# Altium PCB Mp100.PcbDoc (part 1 of 2)
Units mil, origin at the board's own origin, x right, y up, seen from the top; angles counter-clockwise.
Board outline 1180 x 2360 mil, 2 copper layers (Top Layer, Bottom Layer); 72 components, 52 nets, 275 pads, 61 vias.
Unrouted connection lines stored in the file: 1.
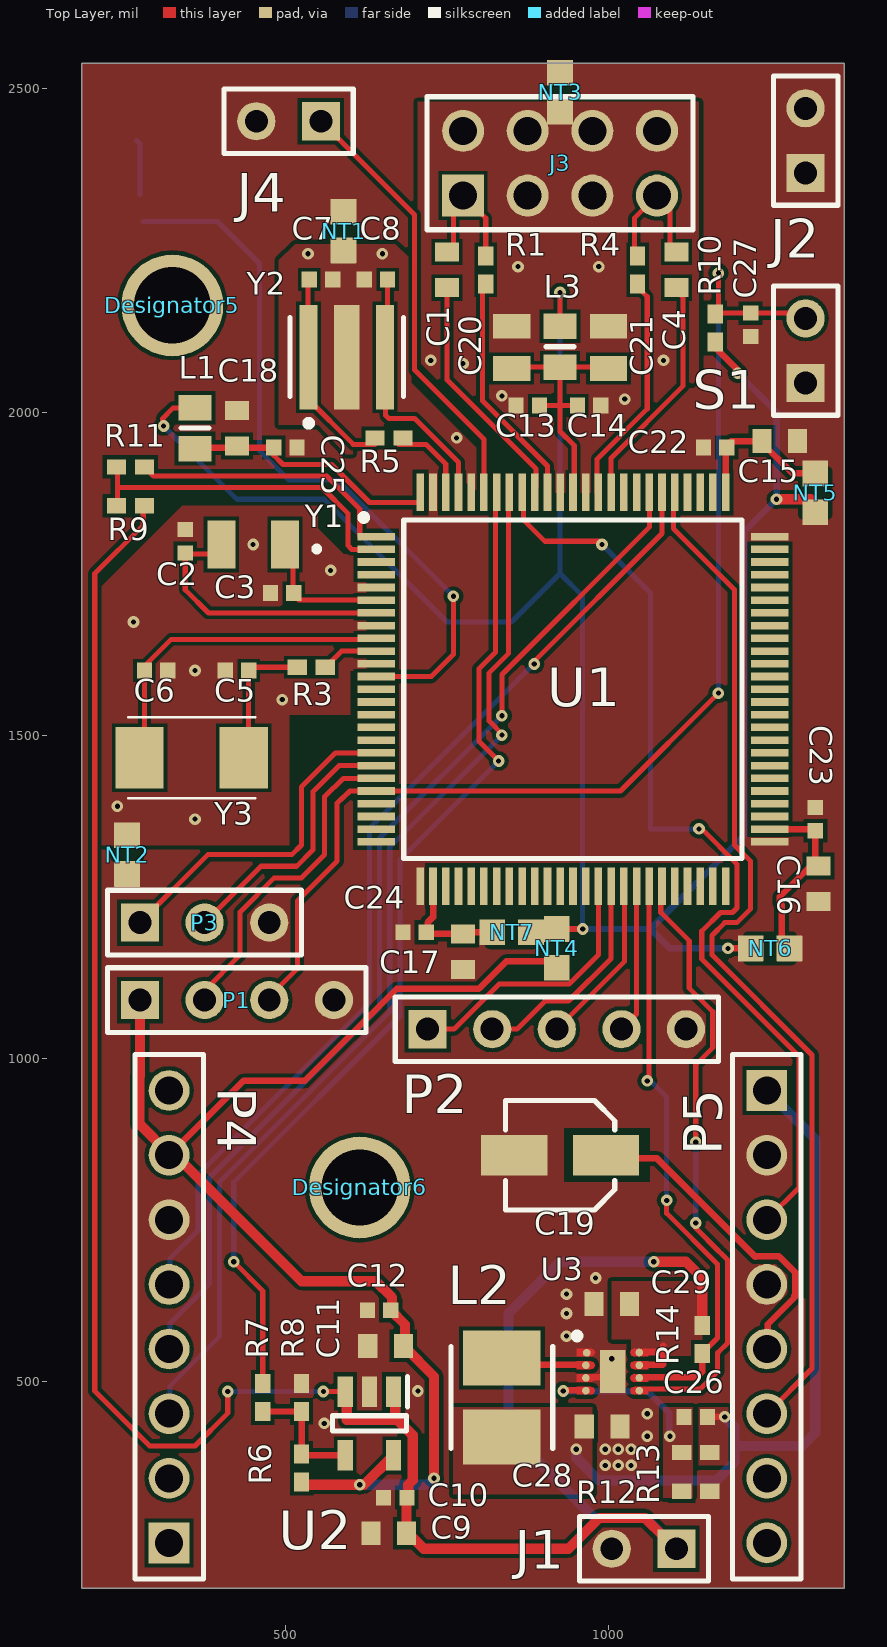
[diagram p0: Top Layer view]
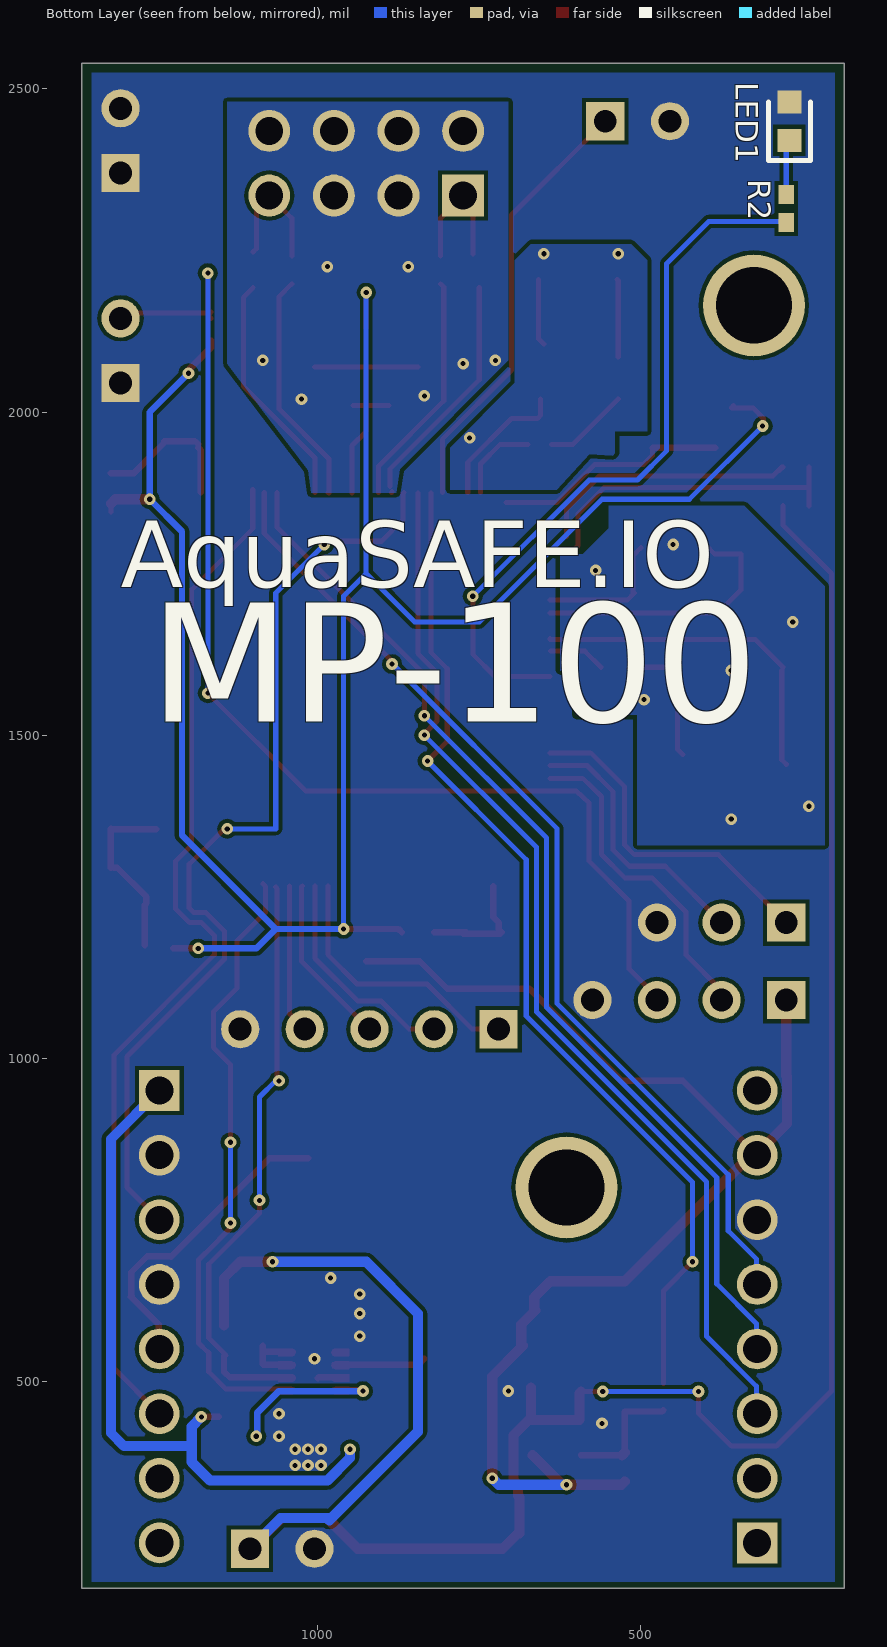
[diagram p1: Bottom Layer view, seen from below]

## Layer stack, top to bottom
Top Solder: solder mask 0.4, Solder Resist, Dk 3.5
Top Layer: signal copper 1.4
Dielectric 1: dielectric 12.6, FR-4, Dk 4.8
Bottom Layer: signal copper 1.4
Bottom Solder: solder mask 0.4, Solder Resist, Dk 3.5

## Board outline
185,180 185,2540 1365,2540 1365,180

## Design rules (kind name [scope] priority, off if disabled: settings)
Clearance [All] p1: gap=6 ignorepadtopadclearanceinfootprint=TRUE
ComponentClearance ComponentClearance_1 [InComponent('J3') vs InComponent('NT3')] p1: gap=0 collisioncheckmode=3 verticalgap=0 showdistances=FALSE
ComponentClearance [All] p2: gap=10 collisioncheckmode=3 verticalgap=10 showdistances=FALSE
HoleSize [All] p1: absolutevalues=TRUE maxlimit=196.85 minlimit=1 maxpercent=80.000 minpercent=20.000
MinimumAnnularRing [All] p1: minimumring=5
MinimumSolderMaskSliver [All] p1: minsoldermaskwidth=2
PlaneClearance [All] p1: clearance=7.87
PlaneConnect [All] p1: planeconnectstyle=Direct reliefexpansion=20 reliefentries=4 reliefconductorwidth=10 reliefairgap=10
PolygonConnect [All] p1: connectstyle=Direct reliefconductorwidth=10 reliefentries=4 polygonreliefangle="90 Angle" airgapwidth=10
RoutingVias [All] p1: holewidth=7.87 width=7.87 viastyle="Through Hole" minholewidth=15.75 minwidth=7.87 maxholewidth=28 maxwidth=50
SilkToSilkClearance [All] p1: silktosilkclearance=5
SilkToSolderMaskClearance [IsPad] p1: minsilkscreentomaskgap=5 clearancetoexposedcopper=TRUE
SolderMaskExpansion [All] p1: expansion=5
UnRoutedNet [All] p1: checkbadconnections=TRUE
Width [All] p1: maxlimit=15.75 minlimit=7.87 preferedwidth=10 minimp=50.000000 maximp=50.000000 favimp=50.000000
22 further rules are at their usual default settings.

## Components (designator, comment, footprint, x,y, rotation, side; value= is the part's Value field where it differs from the comment)
C1 "GRM1885C1H102FA01J" CAPC1608X90N 750,2220 r90 top value=1000pF
C2 "GRM1555C1H120JA01D" CAPC1005X55N 345,1800 r270 top value=12pF
C3 "GRM1555C1H120JA01D" CAPC1005X55N 495,1720 r180 top value=12pF
C4 "GRM1885C1H102FA01J" CAPC1608X90N 1105,2220 r90 top value=1000pF
C5 "GRM1555C1H120JA01D" CAPC1005X55N 425,1600 r180 top value=12pF
C6 "GRM1555C1H120JA01D" CAPC1005X55N 300,1600 r0 top value=12pF
C7 "GRM1555C1H120JA01D" CAPC1005X55N 555,2205 r0 top value=12pF
C8 "GRM1555C1H120JA01D" CAPC1005X55N 640,2205 r180 top value=12pF
C9 "GRM188R61A106ME69D" CAPC1608X90N 660,265 r180 top value=10uF
C10 "GRM155R71C104KA88D" CAPC1005X55N 670,320 r180 top value=0.1uF
C11 "GRM188R61A106ME69D" CAPC1608X90N 655,555 r180 top value=10uF
C12 "GRM155R71C104KA88D" CAPC1005X55N 645,610 r180 top value=0.1uF
C13 "GRM1555C1H102JA01D" CAPC1005X55N 875,2010 r180 top value=1000pF
C14 "GRM1555C1H102JA01D" CAPC1005X55N 970,2010 r180 top value=1000pF
C15 "GRM188R71A105KA61D" CAPC1608X90N 1265,1955 r0 top value=1uF
C16 "GRM188R71A105KA61D" CAPC1608X90N 1325,1270 r90 top value=1uF
C17 "GRM188R71A105KA61D" CAPC1608X90N 775,1165 r270 top value=1uF
C18 "GRM188R71A105KA61D" CAPC1608X90N 425,1975 r90 top value=1uF
C19 "4.7F" WCAP-ASLU_4x5.5 925,850 r0 top
C20 "GRM21BR60J476ME15L" CAPC2012X145N 850,2100 r270 top value=47uF
C21 "GRM21BR60J476ME15L" CAPC2012X145N 1000,2100 r90 top value=47uF
C22 "GRM155R71C104KA88D" CAPC1005X55N 1165,1945 r180 top value=0.1uF
C23 "GRM155R71C104KA88D" CAPC1005X55N 1320,1370 r90 top value=0.1uF
C24 "GRM155R71C104KA88D" CAPC1005X55N 700,1195 r0 top value=0.1uF
C25 "GRM155R71C104KA88D" CAPC1005X55N 500,1945 r0 top value=0.1uF
C26 "GRM1555C1H120JA01D" CAPC1005X55N 1135,445 r0 top value=12pF
C27 "GRM1555C1H102JA01D" CAPC1005X55N 1220,2135 r270 top value=1000pF
C28 "GRM188R61A106ME69D" CAPC1608X90N 990,430 r0 top value=10uF
C29 "GRM188R61A106ME69D" CAPC1608X90N 1005,620 r180 top value=10uF
Designator5 "Comment" "Screw M4" 325,2165 r0 top
Designator6 "Comment" "Screw M4" 615,800 r0 top
J1 "TSW-102-07-G-S" HDR1X2 1105,241.02 r180 top
J2 "TSW-102-07-G-S" HDR1X2 1305,2370 r90 top
J3 "TSW-104-07-G-D" 61300821121 925,2385 r0 top
J4 "HMTSW-102-07-G-S-240" HDR1X2 555,2450 r180 top
L1 "MPZ2012S601A" 6-0805_L 360,1975 r90 top value="600 ohm"
L2 "LQH44PN1R0NP0L" INDM4040X180N 835,475 r270 top value=1uH
L3 "MPZ2012S601A" 6-0805_L 925,2101.02 r90 top value="600 ohm"
LED1 "LTST-C190CKT" LEDC1608X90N 270,2450 r90 bottom value=Red
NT1 "Net-Tie" 2way_MP 590,2280 r90 top net-tie
NT2 "Net-Tie" 2way_MP 255,1315 r270 top net-tie
NT3 "Net-Tie" 2way_MP 925,2495 r90 top net-tie
NT4 "Net-Tie" 2way_MP 920,1170 r270 top net-tie
NT5 "Net-Tie" 2way_MP 1320,1875 r270 top net-tie
NT6 "Net-Tie" 2way_MP 1250,1170 r180 top net-tie
NT7 "Net-Tie" 2way_MP 850,1195 r0 top net-tie
P1 "Header 4" HDR1X4 275,1090 r0 top
P2 "Header 5" HDR1X5 720,1045 r0 top
P3 "Header 3" HDR1X3 275,1210 r0 top
P4 "Sim800c" 61300811121 320,600 r90 top locked
P5 "Sim800c" 61300811121 1245,600 r270 top locked
R1 "CRCW0402200RFKED" RESC1005X40N 810,2220 r270 top value=200
R2 "CRCW0402470RJNED" RESC1005X40N 275,2315 r90 bottom value=470
R3 "CRCW040222R0JNED" RESC1005X40N 540,1605 r0 top value=22
R4 "CRCW0402200RFKED" RESC1005X40N 1045,2220 r270 top value=200
R5 "CRCW040222R0JNED" RESC1005X40N 660,1960 r0 top value=22
R6 "CRCW04021M74FKED" RESC1005X40N 525,366.02 r270 top value=1.74M
R7 "DNP" RESC1005X40N 465,475 r270 top
R8 "CRCW04021M00JNED" RESC1005X40N 525,475 r270 top value=1M
R9 "CRCW0402100KJNED" RESC1005X40N 260,1855 r0 top value=100k
R10 "CRCW040247K0JNED" RESC1005X40N 1165,2130 r270 top value=47k
R11 "CRCW0402100KJNED" RESC1005X40N 260,1915 r180 top value=100k
R12 "CRCW0402470RJNED" RESC1005X40N 1135,330 r180 top value=470
R13 "CRCW0402470RJNED" RESC1005X40N 1135,390 r0 top value=470
R14 "CRCW0402100KJNED" RESC1005X40N 1145,565 r270 top value=100k
S1 "SPST-NO" HDR1X2 1305,2045 r90 top
U1 "MSP430FR6047IPZR" QFP50P1600X1600X160-100N 945,1571.02 r0 top
U2 "TPS78001DDCR" SOT95P280X145-5N 630,435 r270 top
U3 "NCP6354BMTAATBG" SON50P200X200X80-9N-D 1006.34,515.16 r0 top
Y1 "ABS07-32.768KHZ-9-T" ABS-07 450,1795 r180 top
Y2 "AWSCR-8.00CV-T" Abracon_AWSCR-8.00CV-T_0 595,2085 r0 top
Y3 "ABM3-8.000MHZ-D2Y-T" ABM38000MHzD2YT 355,1465 r0 top

## Footprints (in the part's own frame and the unit in brackets; to place one, negate y for a bottom-side part, rotate by r counter-clockwise, add the part's x,y. Pads: shape width x height; smd on the part's side, far side on the other; paste and mask are expansions set on the pad)
2way_MP [mil] "2 way medium power net tie junction"
  rrect5% 40x40 smd paste-100: 1(-30,0) 2(30,0)
6-0805_L [mm] "Chip Resistor, Body 2.0x1.2mm, IPC High Density"
  rect 1x1.3 smd: 1(-0.8,0) 2(0.8,0)
  silkscreen extent 0,-0.55 0,0.55, body extent -1.07,-0.7 1.07,0.7, height 0.7
61300811121 [mm] "Pin Header, pitch 2.54 mm, THT, Vertical, single row, 8p"
  rect 1.6x1.6 hole 1.1: 1(-8.89,0)
  round 1.6 hole 1.1: 2(-6.35,0) 3(-3.81,0) 4(-1.27,0) 5(1.27,0) 6(3.81,0) 7(6.35,0) 8(8.89,0)
  silkscreen extent -10.31,-1.35 10.31,1.35, body extent -10.16,-1.27 10.16,1.27, height 8.57
61300821121 [mm] "Pin Header, pitch 2.54 mm, THT, Vertical, dual row, 8p"
  rect 1.65x1.65 hole 1.1: 1(-3.81,-1.27)
  round 1.65 hole 1.1: 2(-3.81,1.27) 3(-1.27,-1.27) 4(-1.27,1.27) 5(1.27,-1.27) 6(1.27,1.27) 7(3.81,-1.27) 8(3.81,1.27)
  silkscreen extent -5.23,-2.62 5.23,2.62, body extent -5.08,-2.54 5.08,2.54, height 8.59
ABM38000MHzD2YT [mm]
  rect 1.9x2.4 smd: 1(-2.05,0) 2(2.05,0)
  silkscreen extent -2.5,-1.6 2.5,1.6
Abracon_AWSCR-8.00CV-T_0 [mm]
  rect 0.7x4.1 smd paste+0 mask+0: 1(-1.5,0) 3(1.5,0)
  rect 1x4.1 smd paste+0 mask+0: 2(0,0)
  silkscreen extent -2.22,-2.72 2.22,1.55, body extent -2.05,-2.15 2.05,2.15, height 0.25
ABS-07 [mm]
  rect 1.1x1.9 smd: 1(-1.25,0) 2(1.25,0)
  silkscreen extent -2.58,0.09 -2.41,0.26
CAPC1005X55N [mm]
  rect 0.6x0.62 smd: 1(-0.46,0) 2(0.46,0)
CAPC1608X90N [mm]
  rect 0.75x0.94 smd: 1(-0.7,0) 2(0.7,0)
CAPC2012X145N [mm]
  rect 0.97x1.47 smd: 1(-0.83,0) 2(0.83,0)
HDR1X2 [mm] "Connector; Header; 2 Position"
  rect 1.5x1.5 hole 0.9: 1(0,0)
  round 1.5 hole 0.9: 2(2.54,0)
  silkscreen extent -1.27,-1.27 3.81,1.27
HDR1X3 [mm] "Connector; Header; 3 Position"
  rect 1.5x1.5 hole 0.9: 1(0,0)
  round 1.5 hole 0.9: 2(2.54,0) 3(5.08,0)
  silkscreen extent -1.27,-1.27 6.35,1.27
HDR1X4 [mm] "Connector; Header; 4 Position"
  rect 1.5x1.5 hole 0.9: 1(0,0)
  round 1.5 hole 0.9: 2(2.54,0) 3(5.08,0) 4(7.62,0)
  silkscreen extent -1.27,-1.27 8.89,1.27
HDR1X5 [mm] "Connector; Header; 5 Position"
  rect 1.5x1.5 hole 0.9: 1(0,0)
  round 1.5 hole 0.9: 2(2.54,0) 3(5.08,0) 4(7.62,0) 5(10.16,0)
  silkscreen extent -1.27,-1.27 11.43,1.27
INDM4040X180N [mm]
  rect 2.15x3.05 smd: 1(-1.55,0) 2(1.55,0)
  silkscreen extent -2,-2 2,2
LEDC1608X90N [mm]
  rect 0.9x0.95 smd: 1(-0.75,0) 2(0.75,0)
  silkscreen extent -1.55,-0.82 0.75,0.82
QFP50P1600X1600X160-100N [mm]
  rect 1.475x0.3 smd: 1(-7.738,6) 2(-7.738,5.5) 3(-7.738,5) 4(-7.738,4.5) 5(-7.738,4) 6(-7.738,3.5) 7(-7.738,3) 8(-7.738,2.5) 9(-7.738,2) 10(-7.738,1.5) 11(-7.738,1) 12(-7.738,0.5) 13(-7.738,0) 14(-7.738,-0.5) 15(-7.738,-1) 16(-7.738,-1.5) 17(-7.738,-2) 18(-7.738,-2.5) 19(-7.738,-3) 20(-7.738,-3.5) 21(-7.738,-4) 22(-7.738,-4.5) 23(-7.738,-5) 24(-7.738,-5.5) 25(-7.738,-6) 51(7.738,-6) 52(7.738,-5.5) 53(7.738,-5) 54(7.738,-4.5) 55(7.738,-4) 56(7.738,-3.5) 57(7.738,-3) 58(7.738,-2.5) 59(7.738,-2) 60(7.738,-1.5) 61(7.738,-1) 62(7.738,-0.5) 63(7.738,0) 64(7.738,0.5) 65(7.738,1) 66(7.738,1.5) 67(7.738,2) 68(7.738,2.5) 69(7.738,3) 70(7.738,3.5) 71(7.738,4) 72(7.738,4.5) 73(7.738,5) 74(7.738,5.5) 75(7.738,6)
  rect 0.3x1.475 smd: 26(-6,-7.738) 27(-5.5,-7.738) 28(-5,-7.738) 29(-4.5,-7.738) 30(-4,-7.738) 31(-3.5,-7.738) 32(-3,-7.738) 33(-2.5,-7.738) 34(-2,-7.738) 35(-1.5,-7.738) 36(-1,-7.738) 37(-0.5,-7.738) 38(0,-7.738) 39(0.5,-7.738) 40(1,-7.738) 41(1.5,-7.738) 42(2,-7.738) 43(2.5,-7.738) 44(3,-7.738) 45(3.5,-7.738) 46(4,-7.738) 47(4.5,-7.738) 48(5,-7.738) 49(5.5,-7.738) 50(6,-7.738) 76(6,7.738) 77(5.5,7.738) 78(5,7.738) 79(4.5,7.738) 80(4,7.738) 81(3.5,7.738) 82(3,7.738) 83(2.5,7.738) 84(2,7.738) 85(1.5,7.738) 86(1,7.738) 87(0.5,7.738) 88(0,7.738) 89(-0.5,7.738) 90(-1,7.738) 91(-1.5,7.738) 92(-2,7.738) 93(-2.5,7.738) 94(-3,7.738) 95(-3.5,7.738) 96(-4,7.738) 97(-4.5,7.738) 98(-5,7.738) 99(-5.5,7.738) 100(-6,7.738)
  silkscreen extent -8.35,-6.65 6.65,6.87
RESC1005X40N [mm]
  rect 0.75x0.6 smd: 1(-0.55,0) 2(0.55,0)
"Screw M4" [mm]
  round 4 hole 3: mounting(0,0)
SON50P200X200X80-9N-D [mm]
  round 0.3 smd: 1(-1.016,0.736) 2(-1.05,0.25) 3(-1.05,-0.25) 4(-1.05,-0.75) 5(1.05,-0.75) 6(1.05,-0.25) 7(1.05,0.25) 8(1.05,0.75)
  rect 1x1.7 smd: 9(0,0)
  Top Layer region: -1.4,0.9 -0.85,0.912 -0.735,0.865 -0.688,0.75 -0.735,0.635 -0.85,0.588 -0.85,0.6 -1.4,0.6
  Top Layer region: -1.4,0.4 -0.85,0.412 -0.735,0.365 -0.688,0.25 -0.735,0.135 -0.85,0.088 -0.85,0.1 -1.4,0.1
  Top Layer region: -1.4,-0.1 -0.85,-0.088 -0.735,-0.135 -0.688,-0.25 -0.735,-0.365 -0.85,-0.412 -0.85,-0.4 -1.4,-0.4
  Top Layer region: -1.4,-0.6 -0.85,-0.588 -0.735,-0.635 -0.688,-0.75 -0.735,-0.865 -0.85,-0.912 -0.85,-0.9 -1.4,-0.9
  Top Layer region: 1.4,-0.9 0.85,-0.912 0.735,-0.865 0.688,-0.75 0.735,-0.635 0.85,-0.588 0.85,-0.6 1.4,-0.6
  Top Layer region: 1.4,-0.4 0.85,-0.412 0.735,-0.365 0.688,-0.25 0.735,-0.135 0.85,-0.088 0.85,-0.1 1.4,-0.1
  Top Layer region: 1.4,0.1 0.85,0.088 0.735,0.135 0.688,0.25 0.735,0.365 0.85,0.412 0.85,0.4 1.4,0.4
  Top Layer region: 1.4,0.6 0.85,0.588 0.735,0.635 0.688,0.75 0.735,0.865 0.85,0.912 0.85,0.9 1.4,0.9
  silkscreen extent -1.52,1.28 -1.27,1.52
SOT95P280X145-5N [mm]
  rect 1.2x0.6 smd: 1(-1.25,0.95) 2(-1.25,0) 3(-1.25,-0.95) 4(1.25,-0.95) 5(1.25,0.95)
  silkscreen extent -1.85,-1.45 0.3,1.5
WCAP-ASLU_4x5.5 [mm] "Aluminum Electrolytic Capacitors, 4x5.5mm"
  rect 2.6x1.6 smd: 1(1.8,0) 2(-1.8,0)
  silkscreen extent -2.15,-2.15 2.15,2.15, body extent -2.5,-2.15 2.5,2.15, height 5.5

## Part data
C1 C4: "CAP, CERM, 1000 pF, 50 V, +/- 1%, C0G/NP0, 0603", Cap_Case=0603, Manufacturer=MuRata, Supplier Part Number 1=490-6377-1-ND, TempCo=C0G/NP0, Tolerance_%=1%, Value1=Unknown, Value2=50V, ValueDisplayed=1000pF, AEC Category=Q200, AEC Qualified=?, Cap_F=0.000000001, ComponentLink1Description="Datasheet link", ComponentLink1URL=http://search.murata.co.jp/Ceramy/image/img/A01X/G101/ENG/GRM1885C1H102FA01-01.pdf, CompType=Capacitor, LatestRevisionDate=2016-04-09, MountType=SMT, PackageReference=0603, PartNumber=GRM1885C1H102FA01J, Polarized=N, Published=2008-06-19, Publisher="Texas Instruments", RoHS=Y, Supplier 1=Digi-Key, Supplier 2=Mouser, Supplier Part Number 2=81-GRM1885C1H102FA1J, SymbolVersion=2008-07-09, TaMax_C=125, TaMin_C=-55, Technology=Ceramic, U/M=EA, VDC_V=50
C2 C3 C5 C6 C7 C8: "CAP, CERM, 12 pF, 50 V, +/- 5%, C0G/NP0, 0402", Cap_Case=0402, Manufacturer=MuRata, Supplier Part Number 1=81-GRM1555C1H120JA1D, TempCo=C0G/NP0, Tolerance_%=5, Value1=Unknown, Value2=50V, ValueDisplayed=12pF, AEC Category=Q200, AEC Qualified=?, Cap_F=0.000000000012, ComponentLink1Description="Datasheet link", ComponentLink1URL=http://search.murata.co.jp/Ceramy/PnsearchViewAction.do?HnOFG=ON&HnNFG=ON&SEL_CNT=50&sLang=en&sKey=GRM1555C1H120JA01D&x=9&y=9&search=startwith, CompType=Capacitor, MountType=SMT, PackageReference=0402, PartNumber=GRM1555C1H120JA01D, Polarized=N, Published=2008-06-19, Publisher="Texas Instruments", RoHS=Y, Supplier 1=Mouser, Supplier 2=Farnell, Supplier 3=Newark, Supplier Part Number 2=1828875, Supplier Part Number 3=14T3292, SymbolVersion=2008-07-09, TaMax_C=125, TaMin_C=-55, Technology=Ceramic, U/M=EA, VDC_V=50
  C2 C3: LatestRevisionDate=2016-04-09
  C5 C6: LatestRevisionDate=2016-11-28, SizeArea_mm2=0.5, SizeAreaWB_mm2=3, SizeX_mm=1, SizeY_mm=0.5, SizeZ_mm=0.6
  C7 C8: LatestRevisionDate=2017-01-30, SizeArea_mm2=0.5, SizeAreaWB_mm2=3, SizeX_mm=1, SizeY_mm=0.5, SizeZ_mm=0.6
C9 C11 C28 C29: "CAP, CERM, 10 µF, 10 V, +/- 20%, X5R, 0603", Cap_Case=0603, Manufacturer=MuRata, TempCo=X5R, Tolerance_%=20, Value1=Unknown, Value2=10V, ValueDisplayed=10µF, AEC Category=Q200, AEC Qualified=?, Cap_F=0.00001, ComponentLink1Description="Datasheet link", ComponentLink1URL=http://psearch.murata.com/capacitor/product/GRM188R61A106ME69%23.pdf, CompType=Capacitor, LatestRevisionDate=2016-05-21, MountType=SMT, PackageReference=0603, PartNumber=GRM188R61A106ME69D, Polarized=N, Published=2008-06-19, Publisher="Texas Instruments", RoHS=Y, SizeArea_mm2=1.28, SizeAreaWB_mm2=4.68, SizeX_mm=1.6, SizeY_mm=0.8, SizeZ_mm=1, Supplier 4=Quest, Supplier Part Number 4=GRM188R61A106ME69D, SymbolVersion=2008-07-09, TaMax_C=85, TaMin_C=-55, Technology=Ceramic, U/M=EA, VDC_V=10
C10 C12 C22 C23 C24 C25: "CAP, CERM, 0.1 µF, 16 V, +/- 10%, X7R, 0402", Cap_Case=0402, Manufacturer=MuRata, Supplier Part Number 1=490-3261-1-ND, TempCo=X7R, Tolerance_%=10, Value1=Unknown, Value2=16V, ValueDisplayed=0.1µF, AEC Category=Q200, AEC Qualified=?, Cap_F=0.0000001, ComponentLink1Description="Datasheet link", ComponentLink1URL=http://search.murata.co.jp/Ceramy/PnsearchViewAction.do?HnOFG=ON&HnNFG=ON&SEL_CNT=50&sLang=en&sKey=GRM155R71C104KA88D&x=9&y=9&search=startwith, CompType=Capacitor, LatestRevisionDate=2016-03-01, MountType=SMT, PackageReference=0402, PartNumber=GRM155R71C104KA88D, Polarized=N, Published=2008-06-19, Publisher="Texas Instruments", RoHS=Y, Supplier 1=Digi-Key, Supplier 2=Mouser, Supplier 3=Farnell, Supplier Part Number 2=81-GRM155R71C104KA88, Supplier Part Number 3=8819742, SymbolVersion=2008-07-09, TaMax_C=125, TaMin_C=-55, Technology=Ceramic, U/M=EA, VDC_V=16
C13 C14 C27: "CAP, CERM, 1000 pF, 50 V, +/- 5%, C0G/NP0, 0402", Cap_Case=0402, Manufacturer=MuRata, Supplier Part Number 1=490-3244-1-ND, TempCo=C0G/NP0, Tolerance_%=5, Value1=Unknown, Value2=50V, ValueDisplayed=1000pF, AEC Category=Q200, AEC Qualified=?, Cap_F=0.000000001, ComponentLink1Description="Datasheet link", ComponentLink1URL=http://search.murata.co.jp/Ceramy/PnsearchViewAction.do?HnOFG=ON&HnNFG=ON&SEL_CNT=50&sLang=en&sKey=GRM1555C1H102JA01D&x=9&y=9&search=startwith, CompType=Capacitor, LatestRevisionDate=2016-04-09, MountType=SMT, PackageReference=0402, PartNumber=GRM1555C1H102JA01D, Polarized=N, Published=2008-06-19, Publisher="Texas Instruments", RoHS=Y, Supplier 1=Digi-Key, Supplier 2=Mouser, Supplier 3=Farnell, Supplier Part Number 2=81-GRM1555C1H102JA1D, Supplier Part Number 3=8819556, SymbolVersion=2008-07-09, TaMax_C=125, TaMin_C=-55, Technology=Ceramic, U/M=EA, VDC_V=50
  C27: Supplier 4="Freelance Electronics", Supplier Part Number 4=GRM1555C1H102JA01D
C15 C16 C17 C18: "CAP, CERM, 1 µF, 10 V, +/- 10%, X7R, 0603", Cap_Case=0603, Manufacturer=MuRata, Supplier Part Number 1=490-3899-1-ND, TempCo=X7R, Tolerance_%=10, Value1="0.011 ohm", Value2=10V, ValueDisplayed=1µF, AEC Category=Q200, AEC Qualified=?, Cap_F=0.000001, ComponentLink1Description="Datasheet link", ComponentLink1URL=http://search.murata.co.jp/Ceramy/PnsearchViewAction.do?HnOFG=ON&HnNFG=ON&SEL_CNT=50&sLang=en&sKey=GRM188R71A105KA61D&x=9&y=9&search=startwith, CompType=Capacitor, ESR_ohm=0.011, LatestRevisionDate=2016-05-21, MountType=SMT, PackageReference=0603, PartNumber=GRM188R71A105KA61D, Polarized=N, Published=2008-06-19, Publisher="Texas Instruments", RoHS=Y, SizeArea_mm2=1.28, SizeAreaWB_mm2=4.68, SizeX_mm=1.6, SizeY_mm=0.8, SizeZ_mm=1, Supplier 1=Digi-Key, Supplier 2=Mouser, Supplier 3=Farnell, Supplier Part Number 2=81-GRM188R71A105KA1D, Supplier Part Number 3=1845766, SymbolVersion=2008-07-09, TaMax_C=125, TaMin_C=-55, Technology=Ceramic, U/M=EA, VDC_V=10
C19: library part 865090340001, "Wurth Elektronik 4.7F 16 V dc Aluminium Electrolytic Capacitor, WCAP-ASLU Series 1000h 5.5 (Dia.) x 3.85mm", Manufacturer_Name="Wurth Elektronik", Arrow Part Number=865090340001, Datasheet Link=http://uk.rs-online.com/web/p/products/8387942, Geometry.Height=5.5mm, Manufacturer_Part_Number=865090340001
C20 C21: "CAP, CERM, 47 µF, 6.3 V, +/- 20%, X5R, 0805", Cap_Case=0805, Manufacturer=MuRata, Supplier Part Number 1=490-9960-1-ND, TempCo=X5R, Tolerance_%=20, Value1=Unknown, Value2=6.3V, ValueDisplayed=47µF, AEC Category=Q200, AEC Grade=N/A, AEC Qualified=N, Cap_F=0.000047, ComponentLink1Description="Datasheet link", ComponentLink1URL=http://psearch.en.murata.com/capacitor/product/GRM21BR60J476ME15%23.pdf, CompType=Capacitor, LatestRevisionDate=2016-05-21, MountType=SMT, PackageReference=0805, PartNumber=GRM21BR60J476ME15L, Polarized=N, Published=2008-06-19, Publisher="Texas Instruments", RoHS=Y, SizeArea_mm2=2.5, SizeAreaWB_mm2=6.75, SizeX_mm=2, SizeY_mm=1.25, SizeZ_mm=1.45, Supplier 1=Digi-Key, Supplier 2=Mouser, Supplier 3=Farnell, Supplier Part Number 2=81-GRM21BR60J476ME5L, Supplier Part Number 3=2362109, SymbolVersion=2008-07-09, TaMax_C=85, TaMin_C=-55, Technology=Ceramic, U/M=EA, VDC_V=6.3
C26: "CAP, CERM, 12 pF, 50 V, +/- 5%, C0G/NP0, 0402", Cap_Case=0402, Manufacturer=MuRata, Supplier Part Number 1=81-GRM1555C1H120JA1D, TempCo=C0G/NP0, Tolerance_%=5, Value1=Unknown, Value2=50V, ValueDisplayed=15pF, AEC Category=Q200, AEC Qualified=?, Cap_F=0.000000000012, ComponentLink1Description="Datasheet link", ComponentLink1URL=http://search.murata.co.jp/Ceramy/PnsearchViewAction.do?HnOFG=ON&HnNFG=ON&SEL_CNT=50&sLang=en&sKey=GRM1555C1H120JA01D&x=9&y=9&search=startwith, CompType=Capacitor, LatestRevisionDate=2016-11-28, MountType=SMT, PackageReference=0402, PartNumber=GRM1555C1H120JA01D, Polarized=N, Published=2008-06-19, Publisher="Texas Instruments", RoHS=Y, SizeArea_mm2=0.5, SizeAreaWB_mm2=3, SizeX_mm=1, SizeY_mm=0.5, SizeZ_mm=0.6, Supplier 1=Mouser, Supplier 2=Farnell, Supplier 3=Newark, Supplier Part Number 2=1828875, Supplier Part Number 3=14T3292, SymbolVersion=2008-07-09, TaMax_C=125, TaMin_C=-55, Technology=Ceramic, U/M=EA, VDC_V=50
J1 J2: "Header, 100mil, 2x1, Gold, TH", Color=Black, Current_A=6.3, Manufacturer=Samtec, Supplier Part Number 1=SAM1029-02-ND, Voltage_V=550, Cert_CSA=Y, Cert_CULUS=N, Cert_UL=Y, Cert_VDE=N, ClassName=Header, ComponentLink1Description="Datasheet URL", ComponentLink1URL=http://samtec.com/ftppub/pdf/TSW_TH.PDF, CompType=Header, ContactFinish=Gold, Gender=Male, LatestRevisionDate=2016-04-11, MountType=TH, Orientation=Vertical, PackageReference="2x1 Header", PartNumber=TSW-102-07-G-S, PinCount=2, Pitch_mm=2.54, Publisher="Texas Instruments", RoHS=Y, Row_Count=1, Shrouded=N, Supplier 1=Digi-Key, SymbolCreator=a0412235, SymbolVersion=2013-10-31
  J2: DNP=DNP
J3: "Header, 100mil, 4x2, Gold, TH", Color=Black, Current_A=6.3, Manufacturer=Samtec, Supplier Part Number 1=SAM1028-04-ND, Voltage_V=550, Cert_CSA=Y, Cert_CULUS=N, Cert_UL=Y, Cert_VDE=N, ClassName=Header, ComponentLink1Description="Datasheet URL", ComponentLink1URL=http://samtec.com/ftppub/pdf/TSW_TH.PDF, CompType=Header, ContactFinish=Gold, Gender=Male, LatestRevisionDate=2016-12-09, MountType=TH, Orientation=Vertical, PackageReference="4x2 Header", PartNumber=TSW-104-07-G-D, PinCount=8, Pitch_mm=2.54, Publisher="Texas Instruments", RoHS=Y, Row_Count=2, RowSpacing_mm=2.54, Shrouded=N, Supplier 1=Digi-Key, Supplier 4="Avnet Europe", Supplier Part Number 4=TSW-104-07-G-D, SymbolCreator=a0411947, SymbolVersion=2013-12-22
J4: "Header, 100mil, 2x1, Gold, TH", Manufacturer=Samtec, Supplier Part Number 1=HMTSW-102-07-G-S-240-ND, ClassName=Header, ComponentLink1Description="Datasheet URL", ComponentLink1URL=http://www.samtec.com/documents/webfiles/cpdf/HMTSW-XXX-XX-X-X-XXXX-XX-XX-MKT1.pdf, CompType=Header, DNP=DNP, LatestRevisionDate=2016-12-09, MountType=TH, PackageReference="Header, 2.54mm, 2x1, TH", PartNumber=HMTSW-102-07-G-S-240, Publisher="Texas Instruments", RoHS=Y, Supplier 1=Digi-Key, SymbolCreator=a0412235, SymbolVersion=2013-10-31
L1 L3: "Ferrite Bead, 600 ohm @ 100 MHz, 2 A, 0805", Manufacturer=TDK, Supplier Part Number 1=445-2206-1-ND, Value1="0.1 ohm", Value2=2A, ComponentLink1Description="Datasheet link", ComponentLink1URL=http://www.tdk.co.jp/tefe02/e9413_mpz.pdf, CompType="Ferrite Bead", DCR_ohm=0.1, Imax_A=2, LatestRevisionDate=2016-04-05, MountType=SMT, PackageReference=0805, PartNumber=MPZ2012S601A, Published=2014-04-30, Publisher="Texas Instruments", RoHS=Y, Supplier 1=Digi-Key, Supplier 2=Mouser, Supplier 3=Farnell, Supplier Part Number 2=810-MPZ2012S601A, Supplier Part Number 3=1669753, SymbolVersion=2009-06-02, ZTyp@100MHz_Ohm=600
L2: "Murata LQH44P_P0 Series Shielded Wire-wound SMD Inductor 1 H 30% 2950mA Idc", Manufacturer_Name="Murata Electronics", Datasheet Link=https://www.mouser.co.il/datasheet/2/281/o05e-1115425.pdf, Geometry.Height=1.8mm, Manufacturer_Part_Number=LQH44PN1R0NP0L
LED1: "LED, Red, SMD", Color=red, Manufacturer=Lite-On, Power_TotalModule=0.0625, Supplier Part Number 1=160-1181-1-ND, Value1=0.0625W, Value2=2V, ComponentLink1Description="Datasheet link", ComponentLink1URL=http://optoelectronics.liteon.com/en-us/api/DwonloadFileHandler.ashx?txtSpecNo=DS-22-98-0009&txtPartNo=LTST-C190CKT, ComponentLink2Description=digi-key, ComponentLink2URL=https://www.digikey.com/product-detail/en/lite-on-inc/LTST-C190CKT/160-1181-2-ND/269228, CompType=LED, Io_A=0.02, LatestRevisionDate=2016-04-10, MountType=SMT, PackageReference="Red LED, 1.6x0.8x0.8mm", PartNumber=LTST-C190CKT, Published=2008-07-11, Publisher="Texas Instruments", RoHS=Y, Supplier 1=Digi-Key, Supplier 2=Mouser, Supplier Part Number 2=859-LTST-C190CKT, SymbolVersion=2008-12-08, Tjmax_C=85, Type=?, U/M=EA, Vf_V=2
NT1 NT2 NT3 NT4 NT5 NT6 NT7: "Single point connection between nets.", LatestRevisionDate=2015-10-18, LatestRevisionNote="Added Alternate PartNumber and Alternate Manufacturer parameters to appropriate components.", MountType=SMT, PackageReference=N/A, Publisher="Texas Instruments", SymbolCreator=codlsc, SymbolVersion=2009-07-01
P1: "Header, 4-Pin", LatestRevisionDate=17-Jul-2002, LatestRevisionNote="Re-released for DXP Platform.", Publisher="Altium Limited"
P2: "Header, 5-Pin", LatestRevisionDate=17-Jul-2002, LatestRevisionNote="Re-released for DXP Platform.", Publisher="Altium Limited"
P3: "Header, 3-Pin", LatestRevisionDate=17-Jul-2002, LatestRevisionNote="Re-released for DXP Platform.", Publisher="Altium Limited"
P4 P5: library part "Header 8", "Header, 8-Pin", LatestRevisionDate=17-Jul-2002, LatestRevisionNote="Re-released for DXP Platform.", Publisher="Altium Limited"
R1 R4: "RES, 200, 1%, 0.063 W, 0402", Manufacturer=Vishay-Dale, Power_W=0.063, Supplier Part Number 1=541-200LCT-ND, TempCo="100 ppm/C", Tolerance_%=1, Value1=1%, Value2=0.063W, Value_Code=200R, ValueDisplayed=200, AEC Category=Q200, AEC Qualified=?, ComponentLink1Description="Datasheet link", ComponentLink1URL=http://www.vishay.com/docs/20035/dcrcwe3.pdf, CompType=Resistor, EIA_Code=E96, LatestRevisionDate=2016-04-09, MountType=SMT, PackageReference=0402, PartNumber=CRCW0402200RFKED, Published=2008-06-26, Publisher="Texas Instruments", Res_ohm=200, RoHS=Y, Supplier 1=Digi-Key, Supplier 2=Mouser, Supplier 3=Farnell, Supplier Part Number 2=71-CRCW0402-200-E3, Supplier Part Number 3=1469695, SymbolVersion=2009-05-29, Technology="Thick Film", U/M=EA, VDC_V=50
R2: "RES, 470, 5%, 0.063 W, 0402", Manufacturer=Vishay-Dale, Power_W=0.063, Supplier Part Number 1=541-470JCT-ND, TempCo="200 ppm/C", Tolerance_%=5, Value1=5%, Value2=0.063W, Value_Code=470R, ValueDisplayed=470, AEC Category=Q200, AEC Qualified=?, ComponentLink1Description="Datasheet link", ComponentLink1URL=http://www.vishay.com/docs/20035/dcrcwe3.pdf, CompType=Resistor, EIA_Code=E24, LatestRevisionDate=2016-04-09, MountType=SMT, PackageReference=0402, PartNumber=CRCW0402470RJNED, Published=2008-06-26, Publisher="Texas Instruments", Res_ohm=470, RoHS=Y, Supplier 1=Digi-Key, Supplier 2=Mouser, Supplier 3=Farnell, Supplier Part Number 2=71-CRCW0402J-470-E3, Supplier Part Number 3=1537425, SymbolVersion=2009-05-29, Technology="Thick Film", U/M=EA, VDC_V=50
R3 R5: "RES, 22, 5%, 0.063 W, 0402", Manufacturer=Vishay-Dale, Power_W=0.063, Supplier Part Number 1=541-22JCT-ND, TempCo="200 ppm/C", Tolerance_%=5, Value1=5%, Value2=0.063W, Value_Code=22R0, ValueDisplayed=22, AEC Category=Q200, AEC Qualified=?, ComponentLink1Description="Datasheet link", ComponentLink1URL=http://www.vishay.com/docs/20035/dcrcwe3.pdf, CompType=Resistor, EIA_Code=E24, LatestRevisionDate=2016-04-09, MountType=SMT, PackageReference=0402, PartNumber=CRCW040222R0JNED, Published=2008-06-26, Publisher="Texas Instruments", Res_ohm=22, RoHS=Y, Supplier 1=Digi-Key, Supplier 2=Mouser, Supplier 3=Farnell, Supplier Part Number 2=71-CRCW0402J-22-E3, Supplier Part Number 3=1514685, SymbolVersion=2009-05-29, Technology="Thick Film", U/M=EA, VDC_V=50
R6 R7: library part Resistor, "RES, 0, 5%, 0.063 W, 0402", Alternate Manufacturer=-, Manufacturer="Used in BOM report", Alternate PartNumber=-, ComponentLink1Description="Datasheet Link", ComponentLink1URL="Paste URL for datasheet here", CompType=Resistor, LatestRevisionDate=2015-10-18, LatestRevisionNote="Added Alternate PartNumber and Alternate Manufacturer parameters to appropriate components.", MountType="SMT or TH (used in PnP report)", PackageReference="Used in PnP output and some BOM reports", Publisher="Texas Instruments", RoHS="Used in BOM report.  Use Y or N.", SymbolVersion=2009-05-29, U/M=EA
  R6: PartNumber=CRCW04021M74FKED
  R7: PartNumber=DNP
R8: library part Resistor, "RES 1M OHM 1% 1/16W 0402", Alternate Manufacturer=-, Manufacturer="Used in BOM report", Alternate PartNumber=-, ComponentLink1Description="Datasheet Link", ComponentLink1URL="Paste URL for datasheet here", CompType=Resistor, LatestRevisionDate=2015-10-18, LatestRevisionNote="Added Alternate PartNumber and Alternate Manufacturer parameters to appropriate components.", MountType="SMT or TH (used in PnP report)", PackageReference="Used in PnP output and some BOM reports", PartNumber=CRCW04021M00JNED, Publisher="Texas Instruments", RoHS="Used in BOM report.  Use Y or N.", SymbolVersion=2009-05-29, U/M=EA
R9 R11: "RES, 100 k, 5%, 0.063 W, 0402", Manufacturer=Vishay-Dale, Power_W=0.063, Supplier Part Number 1=71-CRCW0402J-100K-E3, TempCo="200 ppm/C", Tolerance_%=5, Value1=5%, Value2=0.063W, Value_Code=100k, ComponentLink1Description="Datasheet link", ComponentLink1URL=http://www.vishay.com/docs/20035/dcrcwe3.pdf, CompType=Resistor, EIA_Code=E24, LatestRevisionDate=2014-07-21, MountType=SMT, PackageReference=0402, PartNumber=CRCW0402100KJNED, Published=2008-06-26, Publisher="Texas Instruments", Res_ohm=100000, RoHS=Y, Supplier 1=Mouser, Supplier 2=Farnell, Supplier 3=Newark, Supplier Part Number 2=1652738, Supplier Part Number 3=59M6699, SymbolVersion=2009-05-29, Technology="Thick Film", U/M=EA, ValueDisplayed=100k, VDC_V=50
R10: "RES, 47 k, 5%, 0.063 W, 0402", Manufacturer=Vishay-Dale, Power_W=0.063, Supplier Part Number 1=541-47KJCT-ND, TempCo="200 ppm/C", Tolerance_%=5, Value1=5%, Value2=0.063W, Value_Code=47k0, ValueDisplayed=47k, ComponentLink1Description="Datasheet link", ComponentLink1URL=http://www.vishay.com/docs/20035/dcrcwe3.pdf, CompType=Resistor, EIA_Code=E24, LatestRevisionDate=2014-07-21, MountType=SMT, PackageReference=0402, PartNumber=CRCW040247K0JNED, Published=2008-06-26, Publisher="Texas Instruments", Res_ohm=47000, RoHS=Y, Supplier 1=Digi-Key, Supplier 2=Farnell, Supplier 3=Newark, Supplier Part Number 2=1514553, Supplier Part Number 3=52K7099, SymbolVersion=2009-05-29, Technology="Thick Film", U/M=EA, VDC_V=50
R12: "RES, 470, 5%, 0.063 W, 0402", Manufacturer=Vishay-Dale, Power_W=0.063, Supplier Part Number 1=541-470JCT-ND, TempCo="200 ppm/C", Tolerance_%=5, Value1=5%, Value2=0.063W, Value_Code=470R, ValueDisplayed=38k, AEC Category=Q200, AEC Qualified=?, ComponentLink1Description="Datasheet link", ComponentLink1URL=http://www.vishay.com/docs/20035/dcrcwe3.pdf, CompType=Resistor, EIA_Code=E24, LatestRevisionDate=2016-04-09, MountType=SMT, PackageReference=0402, PartNumber=CRCW0402470RJNED, Published=2008-06-26, Publisher="Texas Instruments", Res_ohm=470, RoHS=Y, Supplier 1=Digi-Key, Supplier 2=Mouser, Supplier 3=Farnell, Supplier Part Number 2=71-CRCW0402J-470-E3, Supplier Part Number 3=1537425, SymbolVersion=2009-05-29, Technology="Thick Film", U/M=EA, VDC_V=50
R13: "RES, 470, 5%, 0.063 W, 0402", Manufacturer=Vishay-Dale, Power_W=0.063, Supplier Part Number 1=541-470JCT-ND, TempCo="200 ppm/C", Tolerance_%=5, Value1=5%, Value2=0.063W, Value_Code=470R, ValueDisplayed=220k, AEC Category=Q200, AEC Qualified=?, ComponentLink1Description="Datasheet link", ComponentLink1URL=http://www.vishay.com/docs/20035/dcrcwe3.pdf, CompType=Resistor, EIA_Code=E24, LatestRevisionDate=2016-04-09, MountType=SMT, PackageReference=0402, PartNumber=CRCW0402470RJNED, Published=2008-06-26, Publisher="Texas Instruments", Res_ohm=470, RoHS=Y, Supplier 1=Digi-Key, Supplier 2=Mouser, Supplier 3=Farnell, Supplier Part Number 2=71-CRCW0402J-470-E3, Supplier Part Number 3=1537425, SymbolVersion=2009-05-29, Technology="Thick Film", U/M=EA, VDC_V=50
R14: "RES, 100 k, 5%, 0.063 W, 0402", Manufacturer=Vishay-Dale, Power_W=0.063, Supplier Part Number 1=71-CRCW0402J-100K-E3, TempCo="200 ppm/C", Tolerance_%=5, Value1=5%, Value2=0.063W, Value_Code=100k, ValueDisplayed=1M, ComponentLink1Description="Datasheet link", ComponentLink1URL=http://www.vishay.com/docs/20035/dcrcwe3.pdf, CompType=Resistor, EIA_Code=E24, LatestRevisionDate=2014-07-21, MountType=SMT, PackageReference=0402, PartNumber=CRCW0402100KJNED, Published=2008-06-26, Publisher="Texas Instruments", Res_ohm=100000, RoHS=Y, Supplier 1=Mouser, Supplier 2=Farnell, Supplier 3=Newark, Supplier Part Number 2=1652738, Supplier Part Number 3=59M6699, SymbolVersion=2009-05-29, Technology="Thick Film", U/M=EA, VDC_V=50
S1: library part "NKK AB11AH-HA", Supplier Part Number 1="PTS645SM43SMTR 92 LFS", placment=DNP, Supplier 1="Avnet Europe"
U1: "Mixed-Signal Microcontroller, PZ0100A (LQFP-100)", Alternate Manufacturer="Texas Instruments", Alternate PartNumber=MSP430FR6047IPZ, Max Operating Temperature=85°C, Min Operating Temperature=-40°C, Supplier Part Number 1=296-47912-2-ND, ComponentLink1Description="Datasheet Link", ComponentLink1URL=https://sps06.itg.ti.com/sites/KMS/crossdivteams/altium/docs/ComponentDatasheets/SLASEB7_MSP430FR6047_Int.pdf, CompType=IC, LatestRevisionDate=2016-11-30, Manufacturer="Texas Instruments", Manufacturer Part Number=MSP430FR6047IPZR, MountType=SMT, Number of UART Channels=4, PackageDescription=LQFP-100, PackageReference=PZ0100A, PartNumber=MSP430FR6047IPZR, Publisher="Texas Instruments", SizeArea_mm2=256, SizeAreaWB_mm2=324, SizeX_mm=16, SizeY_mm=16, SizeZ_mm=1.6, Supplier 1=Digi-Key, Supplier 2=Digi-Key, Supplier 3="Avnet Europe", Supplier Part Number 2=296-47912-1-ND, Supplier Part Number 3=MSP430FR6047IPZR, SymbolCreator=Altium, SymbolVersion=2016-11-29, U/M=EA
U2: "Single Output LDO, 150 mA, Adjustable 1.22 to 5.25 V Output, 2.2 to 5.5 V Input, with 500 nA Quiescent Current, 5-pin SOT (DDC), -40 to 125 degC, Green (RoHS & no Sb/Br)", Alternate Manufacturer="Texas Instruments", Alternate PartNumber=Equivalent, Dynamic Voltage Scaling=TRUE, Supplier Part Number 1=296-23331-2-ND, Accuracy(%)=3, Code_JEDEC=MO-193, ComponentLink1Description="Manufacturer URL", ComponentLink1URL=http://www.ti.com/, ComponentLink2Description=Datasheet, ComponentLink2URL=http://www.ti.com/general/docs/lit/getliterature.tsp?genericPartNumber=TPS78001&fileType=pdf, ComponentLink3Description="Package Specification", ComponentLink3URL=http://www.ti.com/litv/pdf/mpds123d, DatasheetVersion=SBVS083D, Eco-Plan="Green (RoHS & no Sb/Br)", Iout(Max)(A)=0.15, Iq(Typ)(mA)=0.0005, Manufacturer="Texas Instruments", MountType=SMT, PackageDescription="5-Pin Plastic Small Outline, Body 2.9 x 1.6 mm, 0.95 mm Pitch", PackageReference=DDC0005A, PackageVersion=4204403-2/E, PartNumber=TPS78001DDCR, SubFamily="Single Channel LDO", Supplier 1=Digi-Key, Supplier 2=Digi-Key, Supplier 3=Digi-Key, Supplier 4=Newark, Supplier 5=Mouser, Supplier 6=Avnet, Supplier Part Number 2=296-23331-1-ND, Supplier Part Number 3=296-23331-6-ND, Supplier Part Number 4=95M0131, Supplier Part Number 5=595-TPS78001DDCR, Supplier Part Number 6=TPS78001DDCR, Vdo(Typ)(mV)=200, Vin(Max)(V)=5.5, Vin(Min)(V)=2.2, Vout Adj(Max)(V)=5.25, Vout Adj(Min)(V)=1.22
U3: "ON Semiconductor, NCP6354BMTAATBG Step-Down Switching Regulator 3.3A Adjustable, 0.6  5.5 V, 8-Pin WDFN", Manufacturer_Name="ON Semiconductor", Geometry.Height=0.8mm, Manufacturer_Part_Number=NCP6354BMTAATBG
Y1: "CRYSTAL, 32.768KHZ, 9PF, SMD", Frequency=32.768kHz, Frequency Stability=±20ppm, Manufacturer="Abracon Corporation", Supplier Part Number 1=535-9544-1-ND, ComponentLink1Description="Datasheet Link", ComponentLink1URL=http://www.abracon.com/Resonators/ABS07.pdf, CompType=Crystal, LatestRevisionDate=2016-11-29, MountType=SMT, PackageReference=3.2x0.9x1.5mm, PartNumber=ABS07-32.768KHZ-9-T, Publisher="Texas Instruments", RoHS=Y, Supplier 1=Digi-Key, Supplier 2=Mouser, Supplier 3=Farnell, Supplier Part Number 2=815-ABS07-32.768K9T, Supplier Part Number 3=2101346, SymbolCreator=a0412235, SymbolVersion=2008-07-09, TaMax_C=85, TaMin_C=-40, U/M=EA
Y2: "Ceramic Resonator, 8MHz, 22pF, SMD", Frequency=8MHz, Manufacturer="Abracon Corporation", Supplier Part Number 1=535-10004-1-ND, ComponentLink1Description="Datasheet Link", ComponentLink1URL=http://www.abracon.com/Resonators/AWSCR_CV.pdf, CompType=Resonator, LatestRevisionDate=2017-02-02, MountType=SMT, PackageReference=3.7x3.1mm, PartNumber=AWSCR-8.00CV-T, Publisher="Texas Instruments", RoHS=Y, SizeArea_mm2=11.47, SizeAreaWB_mm2=19.27, SizeX_mm=3.7, SizeY_mm=3.1, SizeZ_mm=1.2, Supplier 1=Digi-Key, Supplier 2=Mouser, Supplier Part Number 2=815-AWSCR-8.00CV-T, SymbolCreator=a0799721, SymbolVersion=2016-2-15, TaMax_C=85, TaMin_C=-25, U/M=EA
Y3: "Crystal, 8MHz, SMD", Frequency=8MHz, Frequency Stability=±30ppm, Manufacturer="Abracon Corporation", Supplier Part Number 1=535-10630-1-ND, ComponentLink1Description="Datasheet Link", ComponentLink1URL=http://www.abracon.com/Resonators/abm3.pdf, CompType=Crystal, LatestRevisionDate=2017-02-02, MountType=SMT, PackageReference="SMD, 2-Leads, Body 3.2x1.3x5 mm", PartNumber=ABM3-8.000MHZ-D2Y-T, Publisher="Texas Instruments", RoHS=E, Supplier 1=Digi-Key, Supplier 2=Mouser, Supplier 3=Farnell, Supplier Part Number 2=815-ABM3-8-D2Y-T, Supplier Part Number 3=2101329, SymbolCreator=a0412235, SymbolVersion=2008-07-09, TaMax_C=85, TaMin_C=-40, U/M=EA

## Via types
v1: diameter 18, hole 8, Top Layer to Bottom Layer, 61 vias

## Nets (pads, with @x,y where several pads share a name; then routed paths per layer and width w, separated by ;. In a path a pad name is that pad's centre, name@x,y a point inside that pad or via, vN(x,y) a via of type N, cw(c..) or ccw(c..) an arc to the next point about the centre after c; other vN are vias at no path point)
4V: C26.2 C28.1 L2.2 P5.1 R13.2 | length 1082.3
  Top Layer w10: C26.2 v1(1180,445)
  Bottom Layer w15.75: v1(950,395) 950,381.59 985.22,346.38 1166.38,346.38 1195,375 1195,400 ; v1(1180,445) 1195,430 1195,400 ; P5.1 1320,875 1320,420 1300,400 1195,400
4V_EN: U1.45 U3.5 | length 957.7
  Top Layer w7.87: U3.5@1046.34,486.5 1047.82,487.98 1141.75,487.98 1168.62,514.85 1168.62,544.73 ; U1.45@1084.76,1270 1080.83,1266.06 1080.83,1225.83 1125,1181.65 1125,1108.46 1161.34,1072.12 1161.34,1016.34 1135,990 v1(1135,870) ; v1(1135,745) 1135,737.27 1171.14,701.14 ; 1170,545 1184.37,559.37 1184.37,687.9 1173.58,698.69
  Bottom Layer w7.87: v1(1135,745) v1(1135,870)
4V_PG: R14.2 U1.44 U3.6 | length 920.7
  Top Layer w7.87: v1(1060,965) 1060.83,965 1062.91,967.09 1062.91,1262.91 U1.44@1065,1265 ; v1(1090,780) 1090,760 1168.62,681.38 1168.62,567 1141.62,540 1145,540 R14.2
  Top Layer w10: U3.6@1046.34,506.18 1136.18,506.18 1145,515 R14.2@1145,540
  Bottom Layer w7.87: v1(1060,965) 1065,965 1090,940 v1(1090,780)
AVCC1: C18.1 C25.1 L1.1 U1.100 | length 365.8
  Top Layer w7.87: C25.1 481.89,1933.11 496.14,1918.86 571.42,1918.86 630.28,1860 U1.100@708.62,1860
  Top Layer w10: L1.1@385,1945 C25.1
CH0_IN: C1.1 U1.91 | length 365.9
  Top Layer w7.87: C1.1 750,2050 887.91,1912.09 U1.91@887.91,1885 ; U1.91@885,1876.61 U1.91
CH0_OUT: R1.2 U1.90 | length 366.4
  Top Layer w7.87: R1.2 805,2193.35 805,2017.27 905.63,1916.64 U1.90
CH1_IN: C4.1 U1.85 | length 368.9
  Top Layer w7.87: U1.85 1004.06,1929.06 1115,2040 1115,2177.44 C4.1@1100,2192.44
CH1_OUT: R4.2 U1.86 | length 366.6
  Top Layer w7.87: U1.86@982.4,1875 U1.86@982.4,1877.64 ; U1.86 U1.86@982.4,1877.64 ; R4.2@1040,2198.35 1060,2178.35 1060,2005 982.4,1927.4 U1.86@982.4,1877.64
CTRL_C: P2.2 U1.41 | length 341.4
  Top Layer w7.87: P2.2 858.53,1045 902,1088.46 938.19,1088.46 1004.06,1154.33 U1.41
CTRL_O: P2.1 U1.40 | length 418.2
  Top Layer w7.87: P2.1 760.81,1045 830.81,1115 939.12,1115 984.37,1160.25 U1.40
DVCC1: C17.1 C24.2 NT7.1 U1.27 | length 185.9
  Top Layer w10: C24.2@715,1195 717.44,1192.56 C17.1 ; C24.2@720,1195 720,1210 728.46,1218.46 U1.27 ; C17.1@770,1195 NT7.1
DVCC2: C16.2 C23.1 NT6.1 U1.52 | length 272.3
  Top Layer w10: U1.52 1319.49,1354.49 C23.1@1320,1355 ; NT6.1@1267.87,1175 1267.87,1237.13 1265,1240 1265,1250 1310,1295 C16.2@1315,1295 ; C16.2@1320,1295 C23.1
DVCC3: C15.1 C22.1 NT5.1 U1.76 | length 231.1
  Top Layer w10: U1.76 1181.22,1941.22 C22.1@1185,1945 ; C22.1@1185,1950 1190,1955 C15.1@1235,1955 ; C15.1 C15.1@1235,1955 ; NT5.1 1285,1905 C15.1@1235,1955
EXT_VCC: C9.1 C10.1 C29.1 J1.1 R9.2 R14.1 U2.1 U2.3 U3.7 U3.8 | length 3744.4
  Top Layer w7.87: R9.2@280,1855 280,1825 205,1750 205,485 290,400 360,400 410.79,450.79 v1(410.79,484.21) ; v1(558.84,484.21) U2.3
  Top Layer w10: U3.7@1046.34,525.87 1084.13,525.87 1085,526.73 1085,545.55 ; U3.8@1046.34,545.55 1085,545.55 ; 1085,555 1085,545.55
  Top Layer w15.75: U2.3 595,481.81 595,440 670,440 ; U2.1@670,490 670,443.9 697.09,416.81 697.09,347.09 ; C9.1 C10.1@687.56,320.55 ; C10.1 C10.1@687.56,320.55 ; C9.1@690,265 713.98,241.02 937.96,241.02 985.37,288.43 1056.57,288.43 1085,260 1086.02,260 J1.1 ; 695,345 690,340 690,322.99 C10.1@687.56,320.55 ; v1(1070,685) 1120,685 1145,660 R14.1
  Bottom Layer w7.87: v1(410.79,484.21) v1(558.84,484.21)
  Bottom Layer w15.75: v1(1070,685) 925,685 845,605 845,421.94 981.94,285 985.37,288.43 1057.6,288.43 J1.1
HFXIN: C6.1 U1.9 Y3.1 | length 527.6
  Top Layer w7.87: Y3.1@275,1455 281.89,1461.89 C6.1 ; C6.1@280,1605 323.27,1648.27 640.35,1648.27 U1.9
HFXOUT: R3.2 U1.10 | length 88.7
  Top Layer w7.87: R3.2 586.65,1630 U1.10@640,1630
JTAG_RESET: C27.1 P1.3 R10.1 S1.2 U1.21 | length 1871.3
  Top Layer w7.87: P1.3 475,1095 518.46,1138.46 518.46,1243.46 580,1305 580,1395 600,1413.54 U1.21 1018.54,1413.54 v1(1170,1565) ; R10.1@1165,2145 1170,2150 R10.1@1170,2153.11 ; R10.1@1165,2155 R10.1@1166.67,2153.33 ; v1(1170,2215) R10.1@1170,2153.11 ; S1.2 1296.89,2153.11 C27.1 R10.1@1170,2153.11
  Bottom Layer w7.87: v1(1170,1565) v1(1170,2215)
JTAG_RXD: P3.2 U1.19 | length 415.5
  Top Layer w7.87: P3.2 462.13,1297.13 517.4,1297.13 542.87,1322.6 542.87,1412.6 ; 545.14,1414.86 583.19,1452.91 U1.19
JTAG_TEST: P1.2 U1.20 | length 507.6
  Top Layer w7.87: P1.2 375,1105 430,1160 430,1226.47 482.78,1279.25 524.81,1279.25 560.75,1315.19 560.75,1405.19 590,1433.23 U1.20
JTAG_TXD: P3.1 U1.18 | length 526.8
  Top Layer w7.87: P3.1 380,1315 510,1315 525,1330 525,1420 577.6,1472.6 U1.18
LED: R2.1 U1.12 | length 1114
  Top Layer w7.87: U1.12 725.71,1590.71 760,1625 v1(760,1715)
  Bottom Layer w7.87: R2.1@280,2295 395,2295 460,2230 460,1940 505,1895 580,1895 v1(760,1715)
LFXIN: C3.1 U1.6 Y1.1 | length 209.9
  Top Layer w7.87: Y1.1@500,1790 511.89,1778.11 C3.1@511.89,1720 ; C3.1@510,1720 521.18,1708.82 U1.6
LFXOUT: C2.2 U1.7 Y1.2 | length 427.2
  Top Layer w7.87: Y1.2 385.79,1780 345,1780 345,1725 380.87,1689.13 U1.7
MCU_VCC: L1.2 L3.2 NT4.1 NT5.2 NT6.2 NT7.2 R10.2 | length 3369.8
  Top Layer w7.87: v1@310,1980 310,1990 326.5,2006.5 L1.2 L1.2@356.5,2010 ; L3.2@925,2130 L3.2 v1(925,2185) ; NT5.2 NT5.2@1320,1858.19
  Top Layer w10: NT7.2@870,1195 875,1200 NT4.1 v1(960,1200) ; R10.2@1165,2110 R10.2 1165,2100 1200,2065 v1(1200,2060) ; v1(1185,1170) NT6.2 NT6.2@1223.44,1170
  Top Layer w15.75: v1(1260,1865) 1284.25,1865 ; 1285,1865 1313.19,1865 NT5.2@1320,1858.19
  Bottom Layer w7.87: v1(311.5,1978.39) 424.88,1865 560,1865 750,1675 850,1675 925,1750 ; v1(925,2185) 925,1750 ; v1(960,1200) 960,1715 925,1750
  Bottom Layer w10: v1(960,1200) 1065,1200 ; v1(1185,1170) 1095,1170 1065,1200 ; v1(1200,2060) 1260,2000 v1(1260,1865) 1210,1815 1210,1345 1065,1200
NetC1_2: C1.2 J3.1 R1.1 | length 204.1
  Top Layer w7.87: C1.2@760,2245 760,2320 J3.1 810,2300 R1.1
NetC4_2: C4.2 J3.7 R4.1 | length 201.5
  Top Layer w7.87: R4.1@1040,2241.65 1040,2300 J3.7 ; J3.7@1085,2335 1095,2325 1095,2252.56 C4.2@1100,2247.56
NetC5_1: C5.1 R3.1 Y3.2 | length 206.7
  Top Layer w7.87: Y3.2@435,1470 443.11,1478.11 C5.1 ; C5.1@445,1605 R3.1
NetC7_1: C7.1 R5.1 Y2.1 | length 253.1
  Top Layer w7.87: Y2.1@535,2020 605,1950 R5.1@638.35,1950 ; Y2.1@535,2085 535,2203.11 C7.1
NetC19_1: C19.1 P5.5 | length 483.9
  Top Layer w10: C19.1@1015,845 1075,845 1227.54,692.46 1228.66,693.58 1263.78,693.58 1288.62,668.74 1288.62,633.62 1287.5,632.5 1289.01,630.99 1246.22,588.21 P5.5@1246.22,551.18
NetC26_1: C26.1 R12.2 R13.1 U3.4 | length 246.7
  Top Layer w10: v1@931.5,486.5 U3.4@963.66,486.5
  Bottom Layer w10: v1(930,485) 1060,485 1093.83,451.17 1093.83,416.17 v1(1095,415)
NetL2_1: L2.1 U3.2 | length 132.4
  Top Layer w10: L2.1@835,535 844.13,525.87 U3.2@963.66,525.87
NetLED1_1: LED1.1 R2.2 | length 85.4
  Bottom Layer w7.87: LED1.1@270,2420 275,2415 R2.2
NetR6_1: R6.1 R7.2 R8.2 U2.4 | length 200.2
  Top Layer w10: R7.2@465,455 466.65,453.35 R8.2 525,390 R6.1 ; R6.1@525,385 525.79,385.79 529.21,385.79 U2.4
  Top Layer w15.75: R6.1@525,390 R6.1@529.21,385.79
PVDD: C13.1 C14.2 C20.2 C21.1 L3.1 U1.88 | length 419
  Top Layer w7.87: C20.2@845,2070 845.47,2069.53 L3.1 ; C13.1@890,2010 C13.1 925,2010 ; C14.2@945,2010 925,2010 ; U1.88@946.97,1875 946.97,1948.03 925,1970 925,2010 ; C21.1@1005,2070 1004.53,2069.53 L3.1 ; 925,2010 L3.1
RF_DTR: P4.3 U1.93 | length 1660.3
  Top Layer w7.87: v1(835,1500) 837.16,1500 815.32,1521.85 815.32,1596.37 845,1626.05 U1.93@845,1875
  Bottom Layer w7.87: P4.3@321.22,451.02 321.22,492.56 398.31,569.65 398.31,808.76 661.5,1071.95 661.5,1326.5 v1(835,1500)
RF_PWK: P5.3 U1.92 | length 1475.6
  Top Layer w7.87: U1.92 868.23,1873.7 868.23,1833.19 901.42,1800 985,1800 v1(990,1795) ; v1(1140,1355) 1144.24,1355 1198.94,1300.31 1198.94,1232.45 1192.02,1225.53 1173.26,1225.53 1144.25,1196.52 1144.25,1153.48 1295,1002.73 1295,800 P5.3
  Bottom Layer w7.87: v1(990,1795) 1065,1720 1065,1355 v1(1140,1355)
RF_RI: P5.6 U1.80 | length 1606.8
  Top Layer w7.87: U1.80@1100.51,1880 1100.51,1819.49 1195,1725 1195,1330 1220,1305 1220,1231.24 1198.54,1209.78 1179.78,1209.78 1160,1190 1160,1160 1315,1005 1315,519.96 P5.6@1246.22,451.18
RF_RXD: P4.5 U1.81 | length 1542.4
  Top Layer w7.87: v1(885,1610) 882.8,1612.2 1082.8,1812.2 U1.81
  Bottom Layer w7.87: P4.5@321.22,651.02 321.22,689.56 364.69,733.02 364.69,819.68 630,1085 630,1355.85 884.15,1610 v1(885,1610)
RF_TXD: P4.4 U1.82 | length 1631.9
  Top Layer w7.87: v1(835,1530) 835,1593.78 1063.11,1821.89 U1.82
  Bottom Layer w7.87: P4.4@321.22,551.02 321.22,589.56 382.56,650.89 382.56,815.29 645.75,1078.48 645.75,1340.75 v1(835,1530)
STS_C: P2.4 U1.43 | length 231.1
  Top Layer w7.87: P2.4 1043.43,1068.43 U1.43
STS_O: P2.3 U1.42 | length 272.5
  Top Layer w7.87: P2.3@915,1040 P2.3 1025,1150 1025,1265.12 U1.42
TARGET_GND: C9.2 C10.2 C11.2 C12.2 C15.2 C16.1 C17.2 C18.2 C19.2 C22.2 C23.2 C24.1 C25.2 C27.2 C28.2 C29.2 J1.2 J2.1 J2.2 J4.2 LED1.2 NT1.2 NT2.2 NT3.2 P1.4 P2.5 P3.3 P4.6 P5.2 P5.4 R8.1 R12.1 S1.1 U1.26 U1.51 U1.75 U1.99 U2.2 U3.1 U3.3 U3.9 | length 36.8
  Top Layer w10: U3.3@963.66,506.18 998.82,506.18 U3.9@1000,505
  other v1: 995,370 1015,370 1035,370 995,395 1015,395 1035,395 1060,415 560,435 1060,450 705,485 1005,535 935,570 935,605 935,635 980,660
TARGET_VCC: C11.1 C12.1 NT4.2 P1.1 P4.7 R6.2 U2.5 | length 2014
  Top Layer w10: P4.7@321.22,851.02 435.2,965 530,965 672.4,1107.4 799.44,1107.4 842.04,1150 NT4.2@925,1150
  Top Layer w15.75: P1.1@275,1085 275,973.02 273.82,971.84 273.82,898.43 P4.7@321.12,851.12 ; P4.7@321.22,851.02 P4.7@321.12,851.12 ; R6.2@525,345 530,340 v1(615,340) 621.61,340 U2.5 ; C11.1 C11.1@685,552.56 ; v1(730,350) 730,507.56 C11.1@685,552.56 ; P4.7@321.12,851.12 P4.7 330,850 525,655 640,655 665,630 665,611.89 C12.1 685,588.11 C11.1@685,552.56
  Bottom Layer w15.75: v1(615,340) 720,340 v1(730,350)
USS_GND: C13.2 C14.1 C20.1 C21.2 J3.2 J3.3 J3.4 J3.5 J3.6 J3.8 NT3.1 U1.87 U1.89
  other v1: 1025,2020 835,2025 775,2075 725,2080 1085,2080 860,2225 985,2225
USSXIN: C8.1 U1.97 Y2.3 | length 317.9
  Top Layer w7.87: Y2.3@650,2105 658.11,2113.11 C8.1 ; Y2.3@655,2020 655,1995 660,1990 700,1990 767.83,1922.17 U1.97
USSXOUT: R5.2 U1.98 | length 129.7
  Top Layer w7.87: R5.2@675,1950 717.73,1950 748.15,1919.58 U1.98
USSXT_BOUT: J4.1 U1.95 | length 678.8
  Top Layer w7.87: J4.1 700,2305 700,2065 807.2,1957.8 U1.95
USSXTAL_GND: C7.2 C8.2 NT1.1 U1.96 Y2.2
  other v1: 765,1960 535,2245 650,2245
VCC_SENSE: R9.1 R11.2 U1.2 | length 526.4
  Top Layer w7.87: R9.1@240,1855 240,1885 ; R11.2@240,1915 240,1885 ; 600,1790 600,1790.33 597.13,1793.2 597.13,1842.6 556.61,1883.11 241.89,1883.11 240,1885 ; 602.44,1787.56 U1.2
VCC_SENSE_EN: R11.1 U1.1 | length 409
  Top Layer w7.87: R11.1@280,1915 R11.1@285,1910 ; R11.1 295.67,1900.98 420,1900.98 ; 420.98,1900.98 564.02,1900.98 615,1850 U1.1@615,1807.4
VSET: R7.1 U1.94 | length 1590
  Top Layer w7.87: v1(420,685) 465,640 R7.1 ; U1.94@825,1875 825,1628.32 799.57,1602.89 799.57,1490.43 v1(830,1460)
  Bottom Layer w7.87: v1(420,685) 420,808.19 677.24,1065.43 677.24,1307.24 v1(830,1460)
XTAL_GND: C2.1 C3.2 C5.2 C6.2 NT2.1 U1.5 U1.8 U1.11
  other v1: 360,1370 240,1390 495,1555 360,1600 265,1675 570,1755 450,1795
pads on no net: Designator5.mounting Designator6.mounting P4.1 P4.2 P4.8 P5.7 P5.8 U1.3 U1.4 U1.13 U1.14 U1.15 U1.16 U1.17 U1.22 U1.23 U1.24 U1.25 U1.28 U1.29 U1.30 U1.31 U1.32 U1.33 U1.34 U1.35 U1.36 U1.37 U1.38 U1.39 U1.46 U1.47 U1.48 U1.49 U1.50 U1.53 U1.54 U1.55 U1.56 U1.57 U1.58 U1.59 U1.60 U1.61 U1.62 U1.63 U1.64 U1.65 U1.66 U1.67 U1.68 U1.69 U1.70 U1.71 U1.72 U1.73 U1.74 U1.77 U1.78 U1.79 U1.83 U1.84

## Polygon pours and split planes (outlines as drawn)
TARGET_GND on Top Layer "Top Layer-No Net" (solid, remove dead copper, pour order 65): 185,180 185,2540 1365,2540 1365,180
EXT_VCC on Top Layer "Top Layer-EXT_VCC" (solid, pour order 63): 1005,655 1005,565 1035,565 1035,540 1145,540 1145,655
XTAL_GND on Top Layer "XTAL_GND_L01_P056" (solid, remove dead copper, pour order 56): 340,1855 550,1855 550,1820 590,1780 625,1780 625,1600 600,1600 600,1531.22 505.57,1531.22 505.57,1330 215.52,1330 215.52,1730.52
USS_GND on Top Layer "Top Layer-USS_GND" (solid, pour order 54): 1140,2055 1140,2165 1140,2480 705,2480 705,2170 705,2080 873.33,1911.67 873.33,1875 1018.57,1875 1018.57,1918.39
USSXTAL_GND on Top Layer "Top Layer-USSXTAL_GND" (solid, pour order 51): 515,2260 670,2260 695,2235 695,2045 795,1945 795,1880 790,1880 735,1935 593.75,1935 551,1980 490,1980 490,2235
4V on Top Layer "Top Layer-4V" (solid, pour order 62): 975,460 760,460 760,325 770,325 975,325
4V on Top Layer "Top Layer-4V 1" (solid, pour order 59): 1140,460 1185,460 1185,370 1140,370
NetC26_1 on Top Layer "Top Layer-NetC26_1" (solid, pour order 60): 1130,460 1130,320 1085,320 1085,460
TARGET_GND on Bottom Layer "TARGET_GND_L02_P064" (solid, remove dead copper, pour order 64): 200,190 200,195 200,2525 1350,2525 1350,190
XTAL_GND on Bottom Layer "XTAL_GND_L02_P058" (solid, remove dead copper, pour order 58): 340,1855 550,1855 550,1820 590,1780 625,1780 625,1600 600,1600 600,1531.22 505.57,1531.22 505.57,1330 215.52,1330 215.52,1730.52